# EAGLE board mbhp_line_driver_transmitter_v1 (EAGLE 6.4)
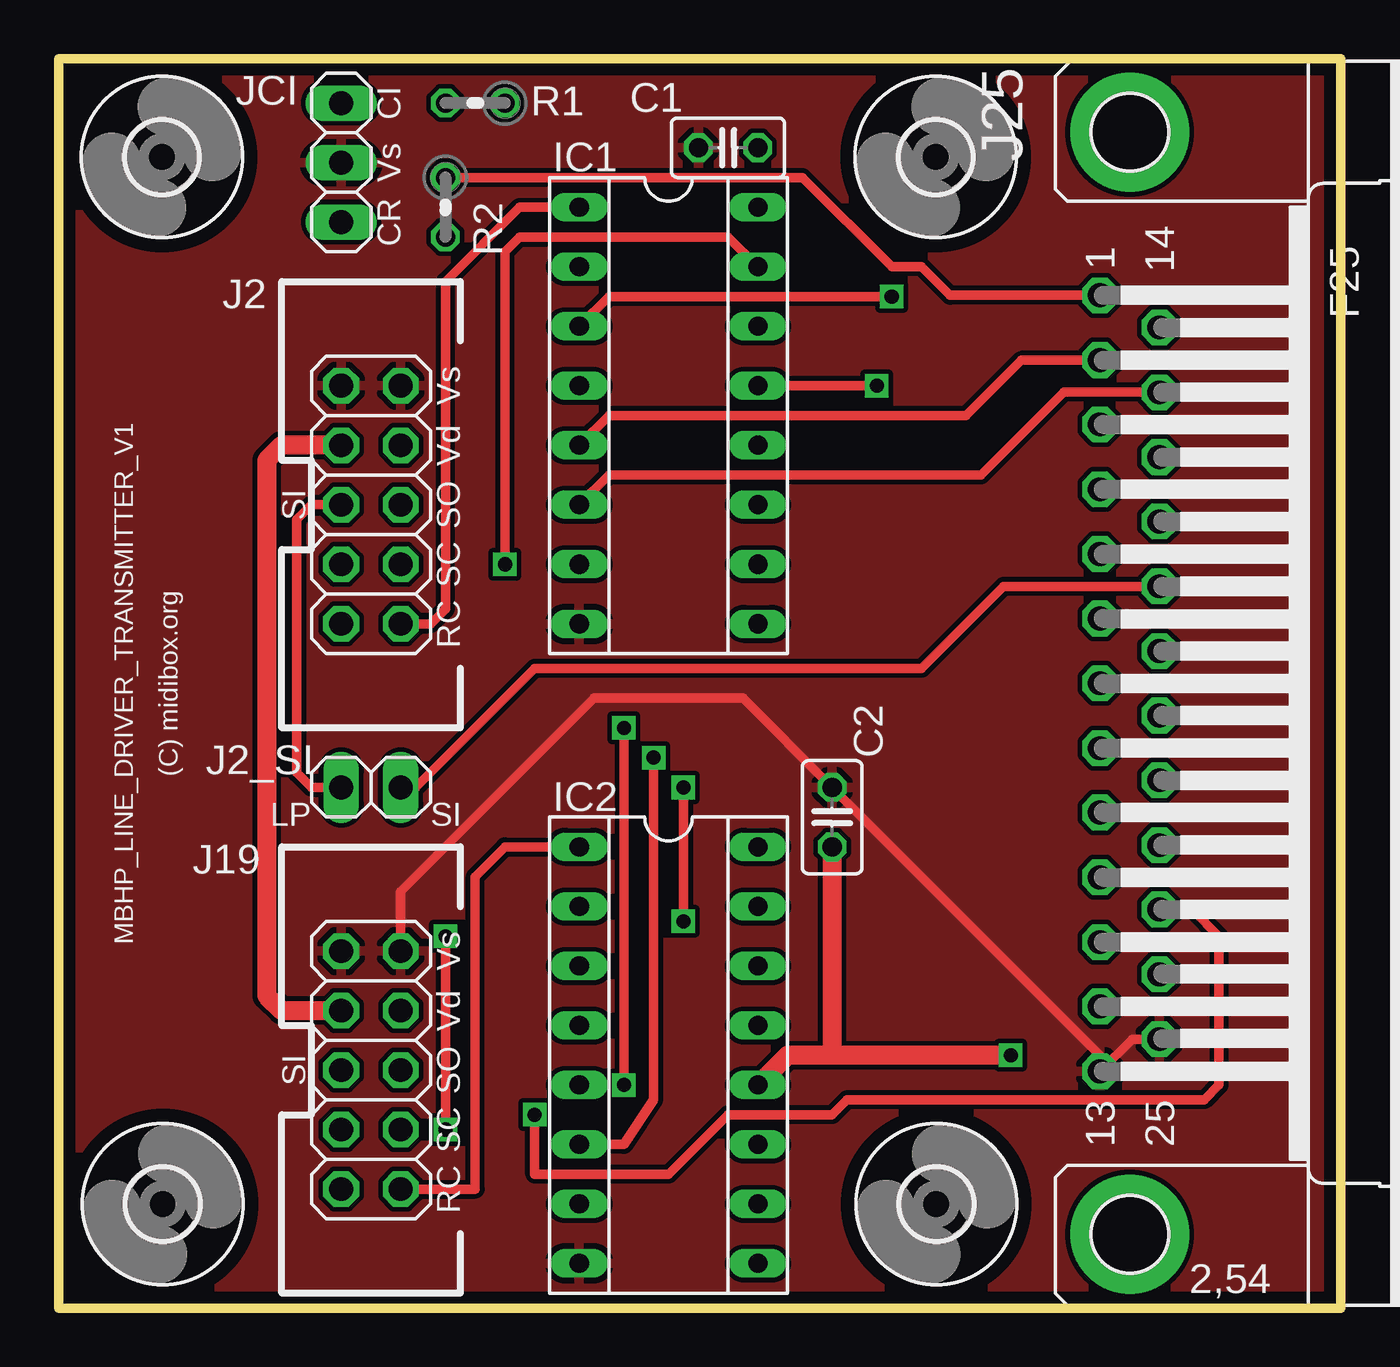
[diagram p0: board, top side]
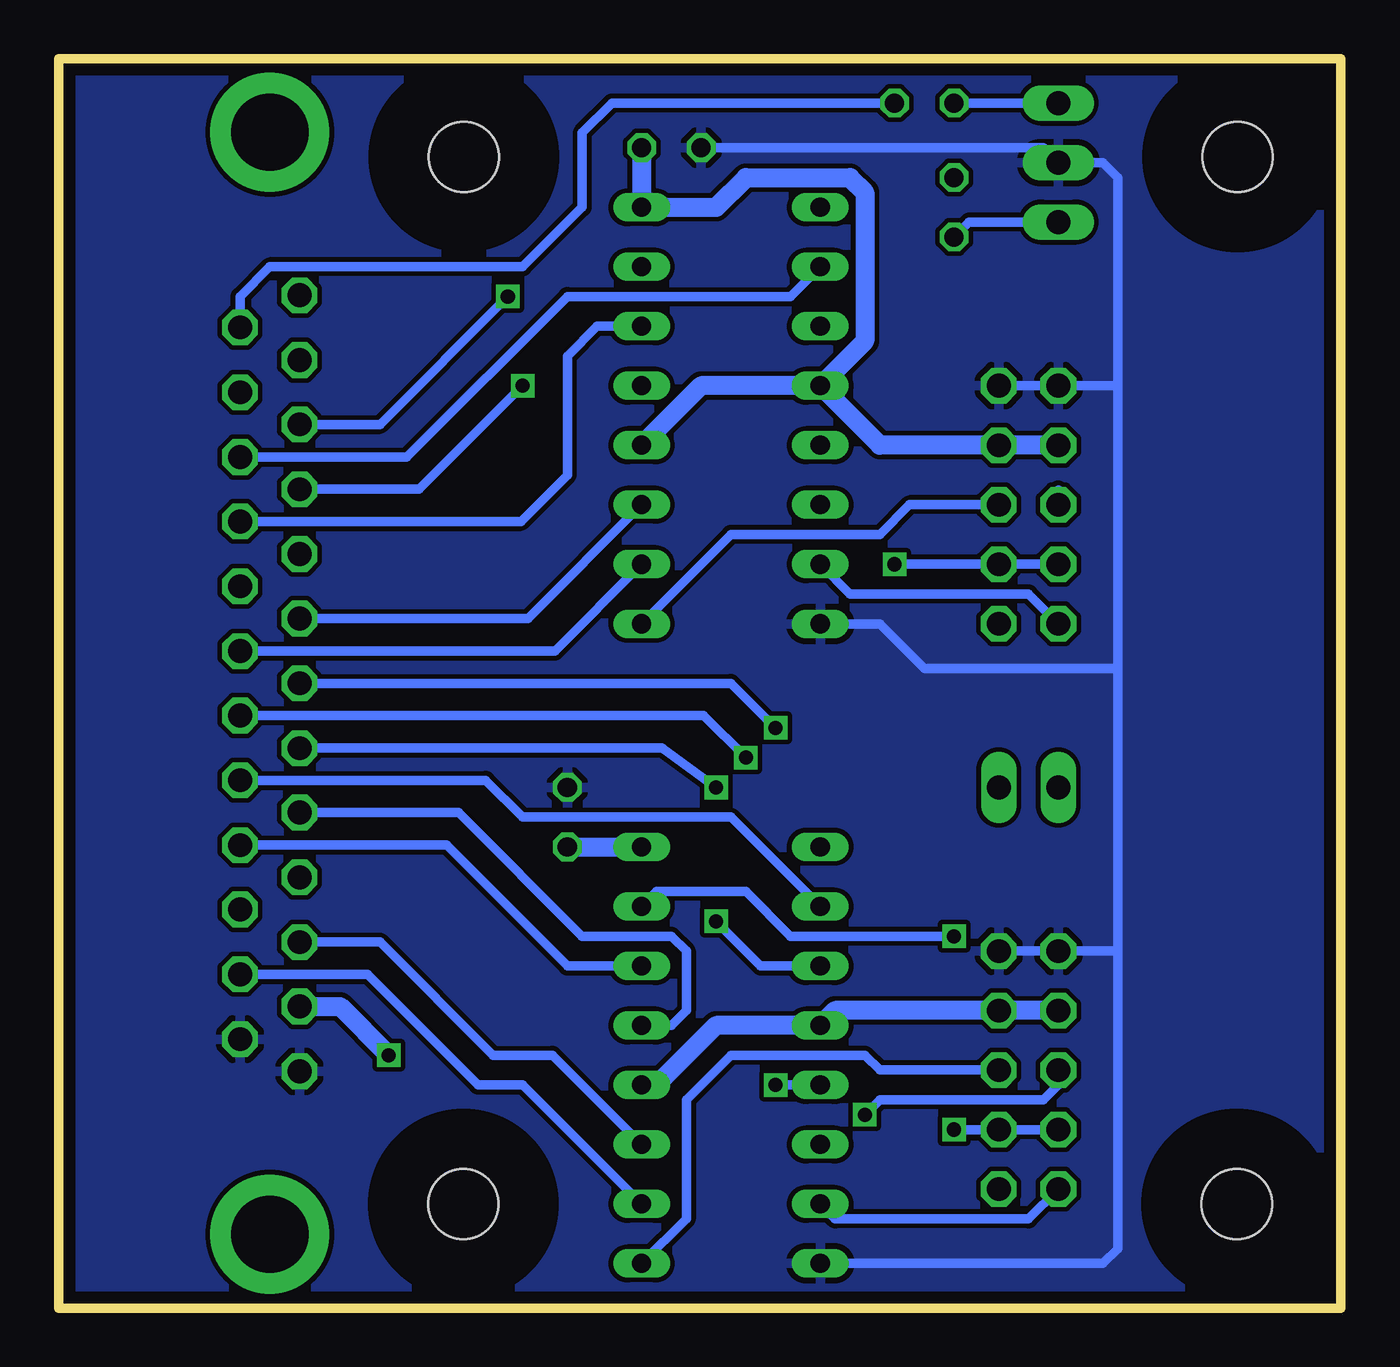
[diagram p1: board, bottom side, seen from below]

Size 54.73 x 53.34 mm. Coordinates in mm from the lower left corner, seen from the top.
Outline: 0,0 0,53.34 54.73,53.34 54.73,0 0,0
Copper layers (1*16): Top 0.035mm / dielectric 1.5mm / Bottom 0.035mm
Design rules "default": minimum track width 8mil, minimum drill 0.6mm, track to track 8mil, track to pad 8mil, pad to pad 8mil, via to via 8mil, smd to smd 0mil, copper to edge 20mil, drill to drill 10mil, minimum pad ring 8mil, minimum via ring 8mil, stop-mask expansion 0mil, vias tented up to drill 0mil, thermal gap 10mil

## Footprints (pad centres in the part's own frame; a part is rotated, then mirrored left to right if it is on the bottom)
C025-025X050 = drill 0.813 octagon: 1 -1.27,0; 2 1.27,0
3,0 = hole 3: 0,0
SOCKET-16 = drill 0.813 long: 1 -8.89,-3.81; 2 -6.35,-3.81; 3 -3.81,-3.81; 4 -1.27,-3.81; 5 1.27,-3.81; 6 3.81,-3.81; 7 6.35,-3.81; 8 8.89,-3.81; 9 8.89,3.81; 10 6.35,3.81; 11 3.81,3.81; 12 1.27,3.81; 13 -1.27,3.81; 14 -3.81,3.81; 15 -6.35,3.81; 16 -8.89,3.81
2X05 = drill 1.016 octagon: 1 -5.08,-1.27; 2 -5.08,1.27; 3 -2.54,-1.27; 4 -2.54,1.27; 5 0,-1.27; 6 0,1.27; 7 2.54,-1.27; 8 2.54,1.27; 9 5.08,-1.27; 10 5.08,1.27
1X02 = drill 1.016 long: 1 -1.27,0; 2 1.27,0
F25HP = drill 1.016 octagon: 1 -16.561,-1.27; 2 -13.792,-1.27; 3 -11.049,-1.27; 4 -8.28,-1.27; 5 -5.512,-1.27; 6 -2.769,-1.27; 7 0,-1.27; 8 2.769,-1.27; 9 5.512,-1.27; 10 8.28,-1.27; 11 11.049,-1.27; 12 13.792,-1.27; 13 16.561,-1.27; 14 -15.189,1.27; 15 -12.421,1.27; 16 -9.652,1.27; 17 -6.909,1.27; 18 -4.14,1.27; 19 -1.372,1.27; 20 1.372,1.27; 21 4.14,1.27; 22 6.909,1.27; 23 9.652,1.27; 24 12.421,1.27; 25 15.189,1.27 | drill 3.302 pad 5.08: G1 -23.52,0; G2 23.52,0
1X03 = drill 1.016 long: 1 -2.54,0; 2 0,0; 3 2.54,0
0204V = drill 0.813 octagon: 1 -1.27,0; 2 1.27,0

## Placement (x,y rotation side)
C1  100n  [C025-025X050]  28.57,49.53 0 top
C2  100n  [C025-025X050]  33.02,20.95 270 top
E$1  [3,0]  37.47,4.45 0 top
E$2  [3,0]  37.44,49.13 0 top
E$4  [3,0]  4.45,4.45 0 top
E$7  [3,0]  4.42,49.13 0 top
IC1  MC3487  [SOCKET-16]  26.04,38.1 270 top
IC2  MC3487  [SOCKET-16]  26.04,10.79 270 top
J2  [2X05]  13.34,34.29 270 top
J2_SI  [1X02]  13.34,22.23 0 top
J19  [2X05]  13.34,10.16 270 top
J25  [F25HP]  45.72,26.67 270 top
JCI  [1X03]  12.06,48.9 90 top
R1  100  [0204V]  17.78,51.44 180 top
R2  100  [0204V]  16.51,46.99 270 top

## Library data of the parts
C1 C2 R1 R2 = rcl
E$1 E$2 E$4 E$7 = holes
IC1 IC2 = ic-package
J2 J2_SI J19 JCI = pinhead
J25 = con-subd

## Nets
5V: C1.2 C2.2 IC1.4 IC1.12 IC1.16 IC2.4 IC2.12 IC2.16 J2.3 J2.4 J19.3 J19.4 J25.12
GND: C1.1 C2.1 IC1.8 IC2.8 J2.1 J2.2 J19.1 J19.2 J25.13 J25.25 JCI.2
S$1: IC2.10 J25.24
S$2: J19.5 J25.23
S$3: IC2.9 J19.6
S$4: IC2.15 J19.7 J19.8
S$5: IC2.1 J19.10
S$6: IC2.7 J19.9
S$7: IC1.7 J2.9
S$8: IC1.1 J2.10
S$9: IC1.15 J2.7 J2.8
S$10: IC1.9 J2.6
S$11: IC2.11 J25.11
S$12: IC2.14 J25.22
S$13: IC2.13 J25.9
S$14: IC2.2 J25.21
S$15: IC2.3 J25.8
S$16: IC2.6 J25.20
S$17: IC2.5 J25.7
S$18: IC1.10 J25.19
S$19: IC1.11 J25.6
S$21: IC1.14 J25.17
S$22: IC1.13 J25.4
S$23: J2_SI.2 J25.18
S$24: IC1.2 J25.16
S$25: IC1.3 J25.3
S$26: IC1.6 J25.15
S$27: IC1.5 J25.2
S$28: JCI.1 R2.2
S$29: JCI.3 R1.2
S$30: J25.14 R1.1
S$31: J25.1 R2.1
SI1: J2.5 J2_SI.1

## Tracks (layer width: path | path; a pad name or v marks a point on that pad's centre or on a via)
5V  (via drill 0.6)
  Top 0.813: v40.64,10.79 33.02,10.79 | 33.02,10.79 31.11,10.79 IC2.12 | J19.3 9.53,12.7 8.89,13.34 8.89,36.2 9.53,36.83 J2.3 | C2.2 33.02,10.79
  Bottom 0.813: J19.3 J19.4 21.59,12.7 IC2.4 26.67,12.06 29.21,9.53 IC2.12 | J25.12 42.72,12.88 v40.64,10.79 | C2.2 IC2.16 | J2.3 J2.4 19.68,36.83 IC1.4 | IC1.4 27.3,39.37 IC1.12 | C1.2 IC1.16 26.67,46.99 25.4,48.26 20.95,48.26 20.32,47.62 20.32,41.27 IC1.4
GND
  Top 0.406: J25.25 45.82,11.48 J25.13 44.45,10.79 C2.1 29.21,26.04 22.86,26.04 14.61,17.78 J19.2
  Bottom 0.406: 9.53,39.37 9.53,48.26 10.16,48.9 JCI.2 12.7,49.53 C1.1 | 9.53,39.37 9.53,27.3 | 9.53,27.3 9.53,15.24 | J19.2 J19.1 9.53,15.24 | J2.2 J2.1 9.53,39.37 | IC2.8 10.16,1.91 9.53,2.54 9.53,15.24 | IC1.8 19.68,29.21 17.78,27.3 9.53,27.3
  pour Top: 0,53.34 54.61,53.34 54.61,0 0,0
  pour Bottom: 0,53.34 54.61,53.34 54.61,0.64 0,0
S$1
  Bottom 0.406: J25.24 41.55,14.25 36.83,9.53 34.92,9.53 IC2.10
S$2  (via drill 0.6)
  Top 0.406: v20.32,8.26 20.32,5.71 26.04,5.71 28.57,8.26 33.02,8.26 33.66,8.89 48.9,8.89 49.53,9.53 49.53,15.88 48.39,17.02 J25.23
  Bottom 0.406: J19.5 12.06,9.53 12.7,8.89 19.68,8.89 v20.32,8.26
S$3
  Bottom 0.406: J19.6 19.68,10.16 20.32,10.79 26.04,10.79 27.94,8.89 27.94,3.81 IC2.9
S$4  (via drill 0.6)
  Top 0.406: v16.51,7.62 v16.51,15.88
  Bottom 0.406: J19.7 J19.8 v16.51,7.62 | v16.51,15.88 23.5,15.88 25.4,17.78 29.21,17.78 IC2.15
S$5
  Top 0.406: J19.10 17.78,5.08 17.78,18.41 19.05,19.68 IC2.1
S$6
  Bottom 0.406: J19.9 13.34,3.81 21.59,3.81 IC2.7
S$7
  Bottom 0.406: J2.9 13.34,30.48 20.95,30.48 IC1.7
S$8
  Top 0.406: J2.10 15.88,29.21 16.51,29.84 16.51,43.81 19.68,46.99 IC1.1
S$9  (via drill 0.6)
  Top 0.406: v19.05,31.75 19.05,45.09 19.68,45.72 28.57,45.72 IC1.15
  Bottom 0.406: J2.7 J2.8 v19.05,31.75
S$10
  Bottom 0.406: J2.6 18.41,34.29 19.68,33.02 26.04,33.02 IC1.9
S$11
  Bottom 0.406: J25.11 41.02,15.62 36.2,10.79 33.66,10.79 IC2.11
S$12
  Bottom 0.406: J25.22 38.18,19.76 33.02,14.61 IC2.14
S$13
  Bottom 0.406: J25.9 37.67,21.16 32.38,15.88 28.57,15.88 27.94,15.24 27.94,12.7 28.57,12.06 IC2.13
S$14
  Bottom 0.406: J25.21 36.5,22.53 34.92,20.95 26.04,20.95 IC2.2
S$15  (via drill 0.6)
  Top 0.406: v26.67,22.23 v26.67,16.51
  Bottom 0.406: J25.8 28.98,23.9 v26.67,22.23 | v26.67,16.51 24.77,14.61 IC2.3
S$16  (via drill 0.6)
  Top 0.406: v25.4,23.5 25.4,8.89 24.13,6.99 IC2.6
  Bottom 0.406: J25.20 27.2,25.3 v25.4,23.5
S$17  (via drill 0.6)
  Top 0.406: v24.13,24.77 v24.13,9.53
  Bottom 0.406: J25.7 26.04,26.67 v24.13,24.77 | v24.13,9.53 IC2.5
S$18
  Bottom 0.406: J25.19 33.55,28.04 IC1.10
S$19
  Bottom 0.406: J25.6 34.7,29.44 IC1.11
S$21
  Bottom 0.406: J25.17 35,33.58 33.02,35.56 33.02,40.64 31.75,41.91 IC1.14
S$22  (via drill 0.6)
  Top 0.406: v34.92,39.37 IC1.13
  Bottom 0.406: J25.4 39.34,34.95 v34.92,39.37
S$23
  Top 0.406: J2_SI.2 15.24,22.23 20.32,27.3 36.83,27.3 40.34,30.81 J25.18
S$24
  Bottom 0.406: J25.16 39.88,36.32 33.02,43.18 23.5,43.18 IC1.2
S$25  (via drill 0.6)
  Top 0.406: v35.56,43.18 23.5,43.18 IC1.3
  Bottom 0.406: J25.3 41.02,37.72 v35.56,43.18
S$26
  Top 0.406: J25.15 42.9,39.09 39.37,35.56 23.5,35.56 IC1.6
S$27
  Top 0.406: J25.2 41.1,40.46 38.73,38.1 23.5,38.1 IC1.5
S$28
  Bottom 0.406: JCI.1 15.88,46.35 R2.2
S$29
  Bottom 0.406: JCI.3 R1.2
S$30
  Bottom 0.406: R1.1 31.11,51.44 32.38,50.16 32.38,46.99 34.92,44.45 45.72,44.45 46.99,43.18 J25.14
S$31
  Top 0.406: J25.1 38.05,43.23 36.83,44.45 35.56,44.45 31.75,48.26 R2.1
SI1
  Top 0.406: J2.5 10.79,34.29 10.16,33.66 10.16,22.86 10.79,22.23 J2_SI.1
  Bottom 0.406: J2.5 12.06,34.92

## Text on the board
tNames: CI | Vs | CR | Vs | Vd | SI | SO | SC | RC | MBHP_LINE_DRIVER_TRANSMITTER_V1 | (C) midibox.org | LP | SI | Vs | Vd | SI | SO | SC | RC